# Altium PCB LORA_NODE_SENSOR.PcbDoc
Units mil, origin at the board's own origin, x right, y up, seen from the top; angles counter-clockwise.
Board outline 3149.61 x 3937.01 mil, 2 copper layers (Top Layer, Bottom Layer); 48 components, 35 nets, 212 pads, 16 vias.
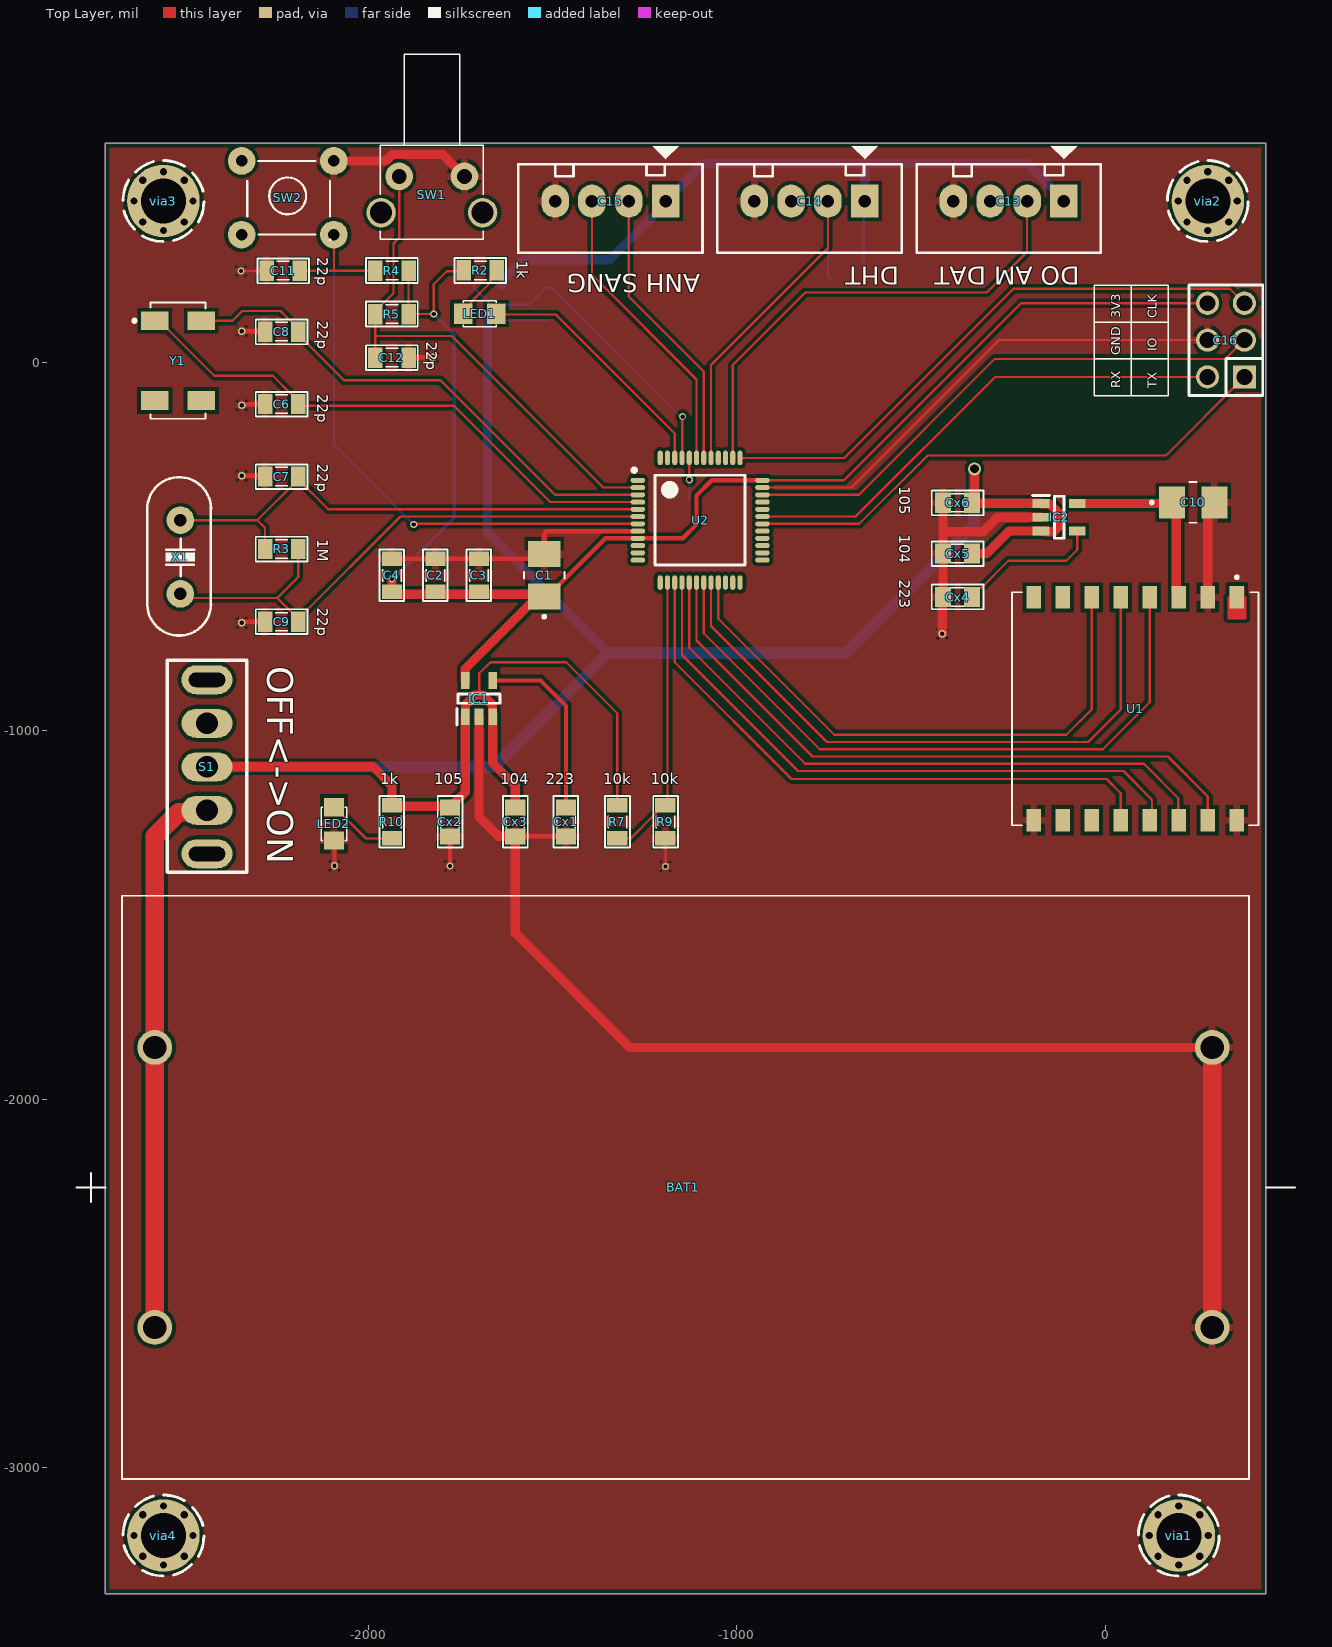
[diagram p0: Top Layer view]
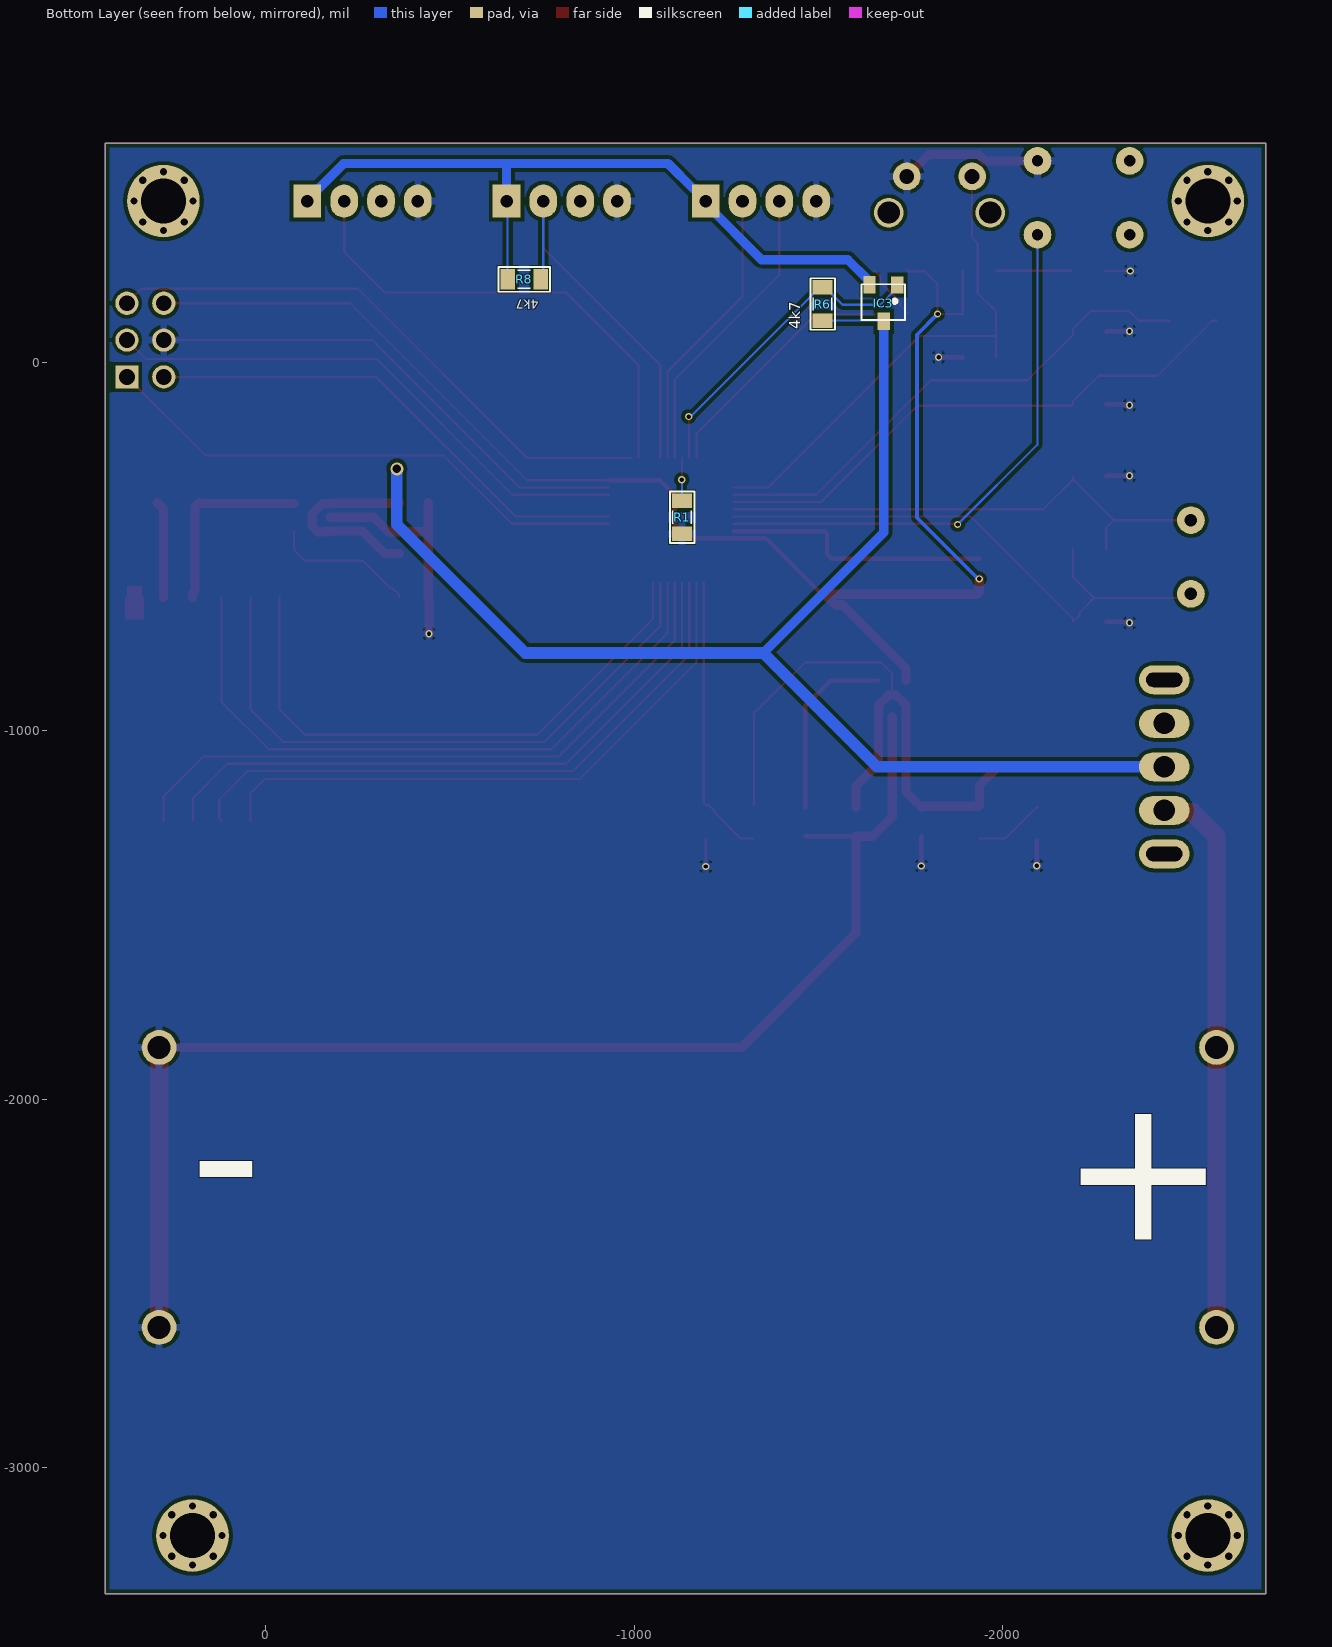
[diagram p1: Bottom Layer view, seen from below]
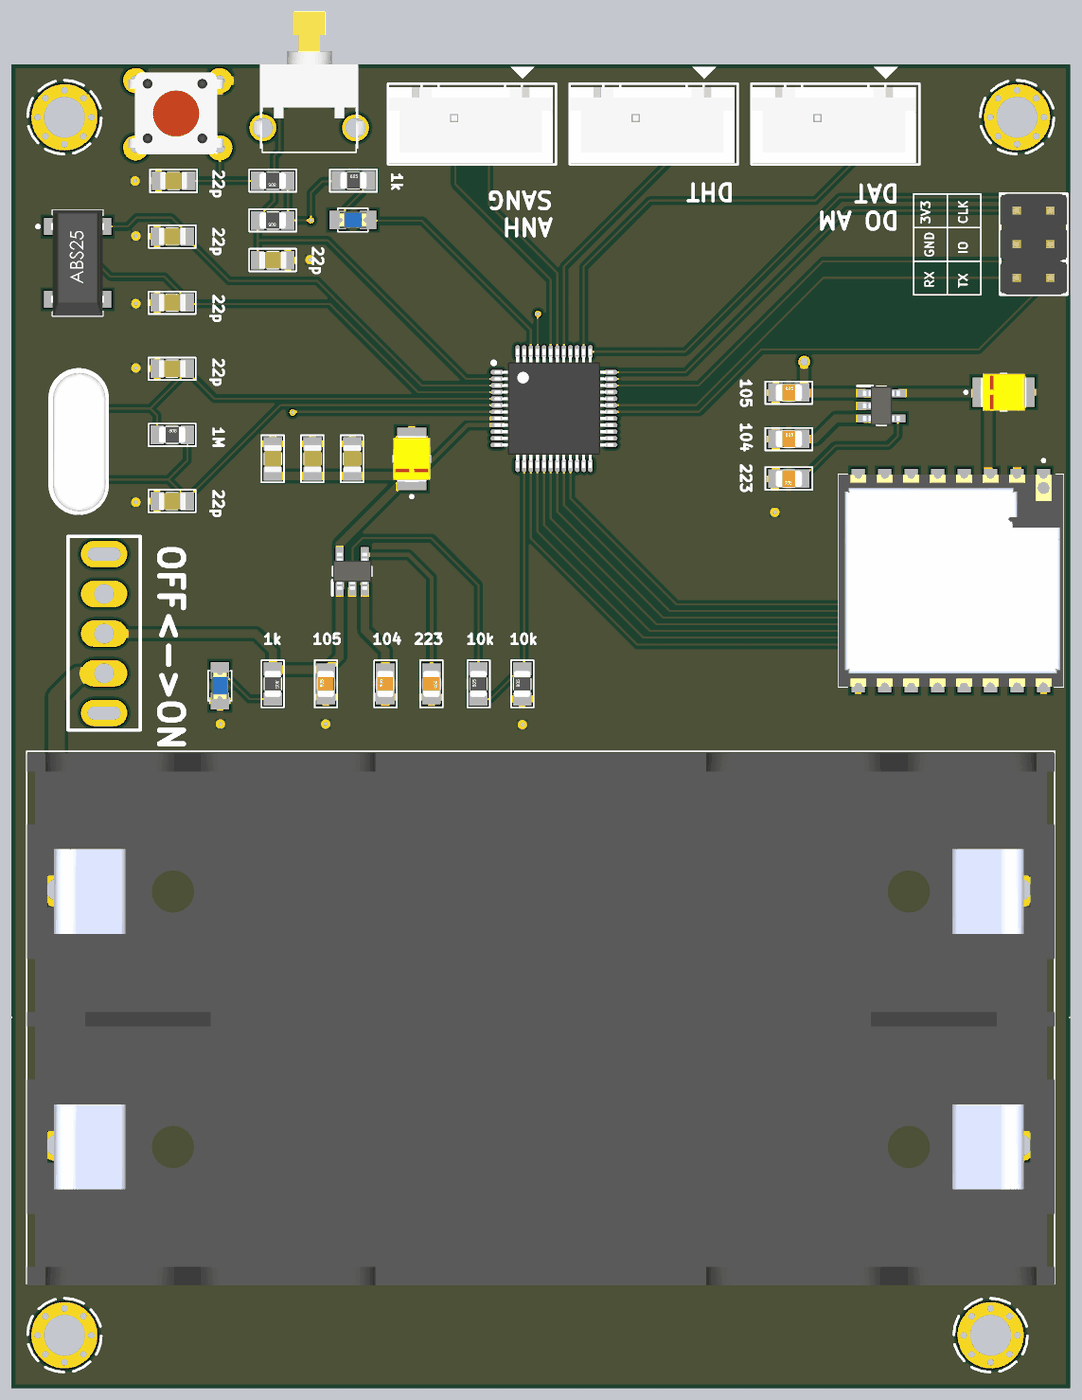
[diagram p2: 3D render of the assembled board from above, using the file's embedded part models]
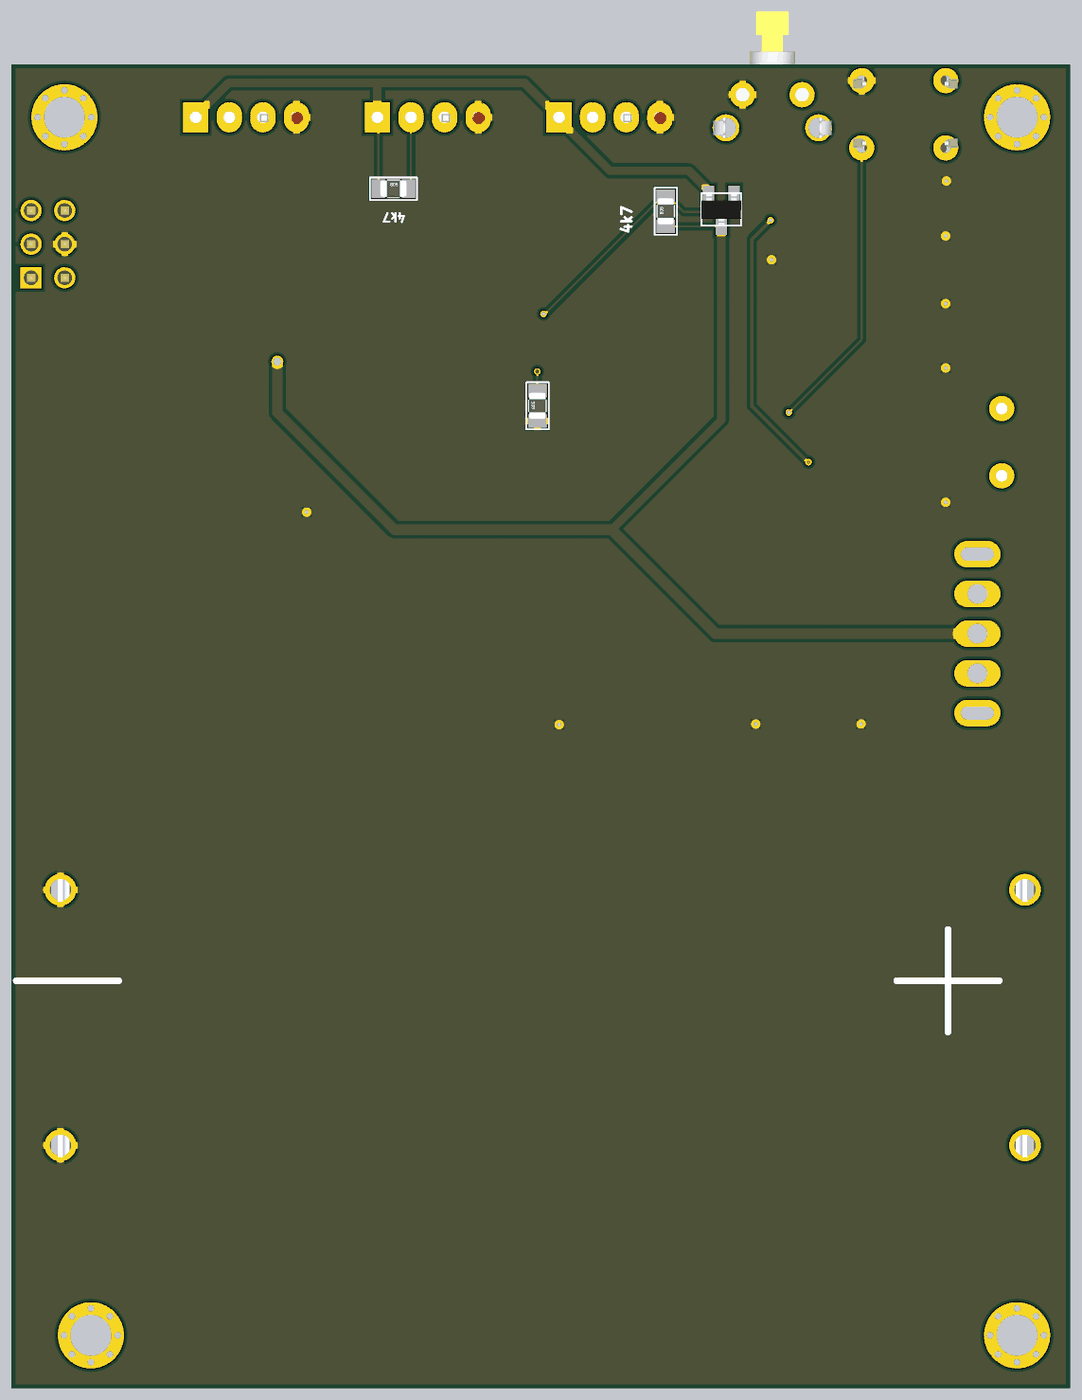
[diagram p3: 3D render of the assembled board from below, using the file's embedded part models]

## Layer stack, top to bottom
Top Solder: solder mask 0.4, Solder Resist, Dk 3.5
Top Layer: signal copper 1.4
Dielectric 1: dielectric 12.6, FR-4, Dk 4.8
Bottom Layer: signal copper 1.4
Bottom Solder: solder mask 0.4, Solder Resist, Dk 3.5

## Board outline
-2714.17,-3341.34 435.43,-3341.34 435.43,595.67 -2714.17,595.67

## Design rules (kind name [scope] priority, off if disabled: settings)
Clearance [All] p1: gap=10 ignorepadtopadclearanceinfootprint=FALSE except(5: Arc-Arc Arc-Track Arc-SMDPad Arc-THPad Arc-Via Arc-Text Arc-Hole Track-Track Track-SMDPad Track-THPad Track-Via Track-Text Track-Hole SMDPad-SMDPad SMDPad-THPad SMDPad-Via SMDPad-Text SMDPad-Hole THPad-THPad THPad-Via THPad-Text THPad-Hole Via-Via Via-Text Via-Hole Text-Text Text-Hole)
PolygonConnect [All] p1: connectstyle=Relief reliefconductorwidth=20 reliefentries=4 polygonreliefangle="90 Angle" airgapwidth=10
RoutingVias [All] p1: holewidth=118.11 width=19.68 viastyle="Through Hole" minholewidth=11.81 minwidth=19.68 maxholewidth=11.81 maxwidth=19.68
SolderMaskExpansion [All] p1: expansion=4 istentingtop=FALSE
Width [All] p1: maxlimit=50 minlimit=6 preferedwidth=25
30 further rules are at their usual default settings.

## Components (designator, comment, footprint, x,y, rotation, side; value= is the part's Value field where it differs from the comment)
BAT1 "18650 Cell" BAT_BK-18650-PC4 -1139.38,-2238.98 r0 top
C1 "Cap Tantalum" "TANTALUM 3528" -1523.24,-577.41 r90 top
C2 "104" CAP_0805 -1818.51,-577.41 r270 top value=33p
C3 "104" CAP_0805 -1700.4,-577.41 r270 top value=33p
C4 "104" CAP_0805 -1936.62,-577.41 r270 top value=33p
C6 "22p" CAP_0805 -2236.11,-112.75 r0 top value=33p
C7 "22p" CAP_0805 -2236.11,-309.35 r0 top value=33p
C8 "22p" CAP_0805 -2236.11,83.85 r0 top value=33p
C9 "22p" CAP_0805 -2236.11,-703.55 r180 top value=33p
C10 "Cap Tantalum" "TANTALUM 3528" 238.01,-379.71 r0 top
C11 "0.1uF" CAP_0805 -2231.9,249.36 r0 top value=33p
C12 "0.1uF" CAP_0805 -1936.62,13.14 r180 top value=33p
C13 "Header4" Header4 -112.61,438.18 r180 top
C14 "Header4" Header4 -653.16,438.18 r180 top
C15 "Header4" Header4 -1193.71,438.18 r180 top
C16 "JP3x2" JP3-D2T 327.16,60.94 r90 top locked
Cx1 "223,0805" CN-SMD-0805 -1464.18,-1246.7 r270 top value=33pF
Cx2 "105,0805" CN-SMD-0805 -1779.14,-1246.7 r90 top value=33pF
Cx3 "104,0805" CN-SMD-0805 -1601.98,-1246.7 r90 top value=33pF
Cx4 "223,0805" CN-SMD-0805 -401.18,-636.46 r180 top value=33pF
Cx5 "105,0805" CN-SMD-0805 -401.19,-518.35 r0 top value=33pF
Cx6 "104,0805" CN-SMD-0805 -401.19,-380.56 r0 top value=33pF
IC1 "SPX3819M5-3.3_TR" SOT95P280X145-5N -1700.4,-912.06 r90 top locked
IC2 "SPX3819M5-3.3_TR" SOT95P280X145-5N -125.6,-419.93 r0 top
IC3 "AO3400" SOT23A -1677.17,161.57 r0 bottom
LED1 "LED-Blue" LED-0805-Blue -1743.32,132.75 r0 top value=Blue
LED2 "LED-Blue" LED-0805-Blue -2094.1,-1207.33 r270 top value=Blue
R1 "10K" RES-SMD-0805 -1129.54,-419.93 r90 bottom
R2 "1K" RES-SMD-0805 -1696.82,250.36 r0 top
R3 "1M" RES-SMD-0805 -2236.11,-505.95 r0 top
R4 "10K" RES-SMD-0805 -1936.62,249.36 r180 top
R5 "10K" RES-SMD-0805 -1936.62,131.25 r180 top
R6 "4.7k" RES-SMD-0805 -1511.03,158.81 r90 bottom
R7 "100k" RES-SMD-0805 -1324.81,-1246.7 r90 top
R8 "4k7" RES-SMD-0805 -701.19,226.13 r180 bottom
R9 "100k" RES-SMD-0805 -1194.5,-1246.7 r90 top
R10 "1K" RES-SMD-0805 -1936.62,-1246.7 r270 top
S1 "Switch" Switch -2438.59,-1333.47 r90 top
SW1 "SW" SW1-DIP -1739.77,505.27 r180 top value="SW chip 2 pin"
SW2 "SW" SW2-DIP -2344.49,547.24 r0 top value="Button chip 4 pin"
U1 "RA-02H" LoRa-02 81.09,-939.77 r270 top locked
U2 "STM32" "LQFP 48" -1100.01,-427.96 r0 top
via1 "via" via 199.2,-3183.87 r0 top
via2 "via" via 277.94,438.18 r0 top
via3 "via" via -2556.7,438.18 r0 top
via4 "via" via -2556.7,-3183.87 r0 top
X1 "12Mhz" XT2 -2510.91,-527.96 r90 top value=4Mhz
Y1 "Crystal" "Crystal 32.768" -2517.33,5.11 r0 top

## Footprints (in the part's own frame and the unit in brackets; to place one, negate y for a bottom-side part, rotate by r counter-clockwise, add the part's x,y. Pads: shape width x height; smd on the part's side, far side on the other; paste and mask are expansions set on the pad)
BAT_BK-18650-PC4 [mm]
  round 2.4 hole 1.6: 1+(-36.6,9.65) 1-(36.3,9.65) 2+(-36.6,-9.65) 2-(36.3,-9.65)
  silkscreen extent -42,-20.1 42,20.1, body extent -38.84,-20.23 38.86,19.98, height 21.74
CAP_0805 [mil]
  rect 39.37x55 smd: 1(-45,0) 2(45,0)
  silkscreen extent -70,-34 70,33, body extent -40,-25 40,25, height 24
CN-SMD-0805 [mil]
  rect 43.31x55 smd: 1(-39.36,0.01) 2(39.37,0.01)
  silkscreen extent -70,-34 70,33, body extent -39,-25 39,25, height 31
"Crystal 32.768" [mm]
  rect 1.9x1.3 smd: 1(-1.6,2.75) 2(-1.6,-2.75) 3(1.6,-2.75) 4(1.6,2.75)
  silkscreen extent -3.11,-4 1.9,4, body extent -2,-4 2,4, height 2.65
Header4 [mil] "CON4"
  rect 75x90 hole 34: 1(0,0)
  oval 75x90 hole 34: 2(100,0) 3(200,0) 4(300,0)
  silkscreen extent -100,-150 400,140, body extent -90,-90 398,136, height 276
JP3-D2T [mm] "6 pins, dual pin, straight, gold plating"
  rect 1.6x1.6 hole 1.1: 1(-2.54,-1.27)
  round 1.6 hole 1.1: 2(0,-1.27) 3(2.54,-1.27) 4(2.54,1.27) 5(0,1.27) 6(-2.54,1.27)
  silkscreen extent -3.81,-2.54 3.81,2.54, body extent -3.81,-2.54 3.81,2.54, height 8.55
LED-0805-Blue [mil]
  rect 50x55 smd: 1(0,0) 2(90,0)
  silkscreen extent 0,-35 90,35, body extent 5,-25 85,25, height 43
LoRa-02 [mm]
  rect 1.536x1 smd paste-2 mask+0: 1(-7.682,7)
  rect 1.536x1 smd: 2(-7.682,5) 3(-7.682,3) 4(-7.682,1) 5(-7.682,-1) 6(-7.682,-3) 7(-7.682,-5) 8(-7.682,-7) 9(7.682,-7) 10(7.682,-5) 11(7.682,-3) 12(7.682,-1) 13(7.682,1) 14(7.682,3) 15(7.682,5) 16(7.682,7)
  Top Layer region: -6.188,6.365 -7.724,6.365 -7.724,6.5 -8.45,6.5 -8.45,7.5 -7.724,7.5 -7.724,7.635 -6.188,7.635
  silkscreen extent -9.17,-8.5 8.03,8.5, body extent -8,-8.5 8,8.5, height 3.4
"LQFP 48" [mm] "LQFP, 48-Leads, Body 7,00x7,00mm, Pitch 0,50mm, IPC Medium Density"
  oval 1x0.35 smd: 1(-4.296,2.75) 2(-4.296,2.25) 3(-4.296,1.75) 4(-4.296,1.25) 5(-4.296,0.75) 6(-4.296,0.25) 7(-4.296,-0.25) 8(-4.296,-0.75) 9(-4.296,-1.25) 10(-4.296,-1.75) 11(-4.296,-2.25) 12(-4.296,-2.75) 25(4.296,-2.75) 26(4.296,-2.25) 27(4.296,-1.75) 28(4.296,-1.25) 29(4.296,-0.75) 30(4.296,-0.25) 31(4.296,0.25) 32(4.296,0.75) 33(4.296,1.25) 34(4.296,1.75) 35(4.296,2.25) 36(4.296,2.75)
  oval 0.35x1 smd: 13(-2.75,-4.296) 14(-2.25,-4.296) 15(-1.75,-4.296) 16(-1.25,-4.296) 17(-0.75,-4.296) 18(-0.25,-4.296) 19(0.25,-4.296) 20(0.75,-4.296) 21(1.25,-4.296) 22(1.75,-4.296) 23(2.25,-4.296) 24(2.75,-4.296) 37(2.75,4.296) 38(2.25,4.296) 39(1.75,4.296) 40(1.25,4.296) 41(0.75,4.296) 42(0.25,4.296) 43(-0.25,4.296) 44(-0.75,4.296) 45(-1.25,4.296) 46(-1.75,4.296) 47(-2.25,4.296) 48(-2.75,4.296)
  silkscreen extent -4.67,-3.1 3.1,3.57, body extent -4.5,-4.5 4.5,4.5, height 1.6
RES-SMD-0805 [mil]
  rect 39.37x55 smd: 1(-45,0) 2(45,0)
  silkscreen extent -70,-34 70,33, body extent -39,-25 39,25, height 31
SOT23A [mm] "SOT 23A"
  rect 0.85x1.2 smd: 1(-0.94,-1.245) 2(0.005,1.25) 3(0.985,-1.25)
  silkscreen extent -1.47,-1.3 1.52,1.17, body extent -1.5,-1.3 1.5,1.2, height 1.06
SOT95P280X145-5N [mm]
  rect 1.15x0.6 smd: 1(-1.25,0.95) 2(-1.25,0) 3(-1.25,-0.95) 4(1.25,-0.95) 5(1.25,0.95)
  silkscreen extent -1.83,-1.45 0.33,1.5, body extent -1.4,-1.45 1.4,1.45, height 1.45
SW1-DIP [mil]
  round 75 hole 40: 1(0,0) 2(177.16,0)
  round 80 hole 60: ""(-49.21,98.43) ""(226.38,98.43)
  silkscreen extent -51,-331 228,171, body extent -87,-398 265,160, height 283
SW2-DIP [mil] "SW button 4pin, 250 x250 mil"
  round 75 hole 31: 1(0,0) 2(0,-200) 3(250,-200) 4(250,0)
  silkscreen extent 15,-215 240,0, body extent -36,-220 276,24, height 276
Switch [mm]
  oval 2x3.5 hole 1.5: 1(3,0) 2(6,0) 3(9,0)
  oval 2x3.5 hole 1 slot 2.5 at 90 deg: ""(0,0) ""(12,0)
  silkscreen extent -1.27,-2.73 13.33,2.73
"TANTALUM 3528" [mm] "3528"
  rect 1.79x2.21 smd: 1(-1.46,0) 2(1.46,0)
  silkscreen extent -2.95,-1.4 0.25,1.4, body extent -1.75,-1.4 1.75,1.4, height 2.1
via [mm] "via?"
  round 0.5 hole 0.5: 1(-2.032,0) 1(-1.437,-1.437) 1(-1.437,1.437) 1(0,-2.032) 1(0,2.032) 1(1.437,-1.437) 1(1.437,1.437) 1(2.032,0)
  round 5 hole 3.1: 1(0,0)
  silkscreen extent -2.78,-2.78 2.78,2.8
XT2 [mil] "Footpin for Crystal 2 pin"
  round 75 hole 34: 1(-100,0) 2(100,0)
  silkscreen extent -213,-83 217,90, body extent -216,-87 216,90, height 144

## Part data
BAT1: "Battery Holder (Open) 18650 2 Cell PC Pin", Package=None, Availability=Unavailable, MP=BK-18650-PC4, Price=None
C1 C10: "Capacitor, Tantalum", Package="SMD-2 Kemet", Availability="In Stock", Check_prices=https://www.snapeda.com/parts/T493C106K020BH6310/Kemet/view-part/?ref=eda, MF=Kemet, MP=T493C106K020BH6310, Price=None, SnapEDA_Link=https://www.snapeda.com/parts/T493C106K020BH6310/Kemet/view-part/?ref=snap
C2 C3 C4 C6 C7 C8 C9 C11 C12: library part CapSMD, "Capacitor", LatestRevisionDate=17-Jul-2002, LatestRevisionNote="Re-released for DXP Platform.", PackageReference=RAD-0.3, Published=8-Jun-2000, Publisher="Altium Limited"
C13 C14 C15: "Header IDC, 4 x 1 Pin Vertical 2.54mm Pitch (Non-Boxed, Male)", Manufacturer="W¨¹rth Elektronik eiSos GmbH", partNo=613002143121, ComponentLink1 Description=Manufacturer, ComponentLink1URL=http://www.we-online.com, ComponentLink2 Description=Datasheet, ComponentLink2URL=http://katalog.we-online.de/em/datasheet/6130xx143121.pdf, Created by="Karrer Zheng", Created Date="29 March 2013", NoPins=02
C16: "WR-PHD 2.54 mm Dual Socket Header", Manufacturer="W¨¹rth Elektronik eiSos GmbH", partNo=61300621821, ComponentLink1 Description=Manufacturer, ComponentLink1URL=http://www.we-online.com, ComponentLink2 Description=Datasheet, ComponentLink2URL=http://katalog.we-online.de/em/datasheet/6130xx21821.pdf, Created by="Karrer Zheng", Created Date="29 March 2013", NoPins=06
Cx1 Cx2 Cx3 Cx4 Cx5 Cx6: library part CN
IC1 IC2: "Integrated Circuit", Manufacturer_Name=MaxLinear, Manufacturer_Part_Number=SPX3819M5-3.3/TR, Datasheet Link=https://assets.maxlinear.com/web/documents/spx3819.pdf, Height=1.45mm
IC3: library part MOSFET_N, "Generic N Channel MOSFET"
LED1 LED2: "LED Blue 10mA 2.2v", ComponentLink1Description=Datasheet, ComponentLink1URL="D:\Dropbox\Datasheets\Opto and Illumination\LEDs\SMD LED.pdf", Unit Price=0.0476
R1 R3 R4 R5 R6 R8: library part Res-SMD, "Resistor", Manufacturer="Generic Components", Class=Passive, Published=08/06/2000, Publisher="Altium Hobart Technology Centre"
R2 R7 R9 R10: library part "Resistor - SMD", "Resistor SMD", Manufacturer="Generic Components", Class=Passive, Published=08/06/2000, Publisher="Altium Hobart Technology Centre"
SW1: library part SW2, "Switch button 2 pin"
SW2: library part SW4, "Switch button 4 pin"
U1: "Ai-Thinker Lora Series Module", Package=Package, Availability="Not in stock", Check_prices=https://www.snapeda.com/parts/RA-01H/AI-Thinker/view-part/?ref=eda, MF=AI-Thinker, MP=RA-01H, Price=None, SnapEDA_Link=https://www.snapeda.com/parts/RA-01H/AI-Thinker/view-part/?ref=snap
U2: library part STM32F103C8T6, "STM32 ARM-based 32-bit MCU with 64 Kbytes Flash, 64-pin LQFP, Industrial Temperature"
via1 via2 via3 via4: library part "Vit oc"
X1: library part XT2, "Crystal, 32.768 KHz, -40 to 85 degC, 3.2 x 1.5 x 0.9 mm SMD"
Y1: "32.768 kHz", Package="4-4 Abracon", Availability="In Stock", Check_prices=https://www.snapeda.com/parts/ABS25-32.768KHZ-6-1-T/Abracon+LLC/view-part/?ref=eda, MF=Abracon, MP=ABS25-32.768KHZ-6-1-T, Price=None, Purchase-URL=https://pricing.snapeda.com/search/part/ABS25-32.768KHZ-6-1-T/?ref=eda, SnapEDA_Link=https://www.snapeda.com/parts/ABS25-32.768KHZ-6-1-T/Abracon+LLC/view-part/?ref=snap

## Via types
v1: diameter 19.68, hole 11.81, Top Layer to Bottom Layer, 15 vias
v2: diameter 35.43, hole 23.62, Top Layer to Bottom Layer, 1 vias

## Nets (pads, with @x,y where several pads share a name; then routed paths per layer and width w, separated by ;. In a path a pad name is that pad's centre, name@x,y a point inside that pad or via, vN(x,y) a via of type N, cw(c..) or ccw(c..) an arc to the next point about the centre after c; other vN are vias at no path point)
+3.3LORA: C10.1 IC2.5 U1.3 | length 523.4
  Top Layer w25: IC2.5 177.71,-382.53 C10.1 192.02,-391.2 192.02,-619.59 199.2,-626.78 U1.3
+3.3MCU: C1.1 C2.2 C3.2 C4.2 C16.4 IC1.5 R2.1 R4.1 R5.1 U2.9 U2.36 | length 4135.6
  Top Layer w6: R4.1 R5.1 -1891.23,131.65 v1(-1823.24,131.65) -1823.24,212.35 -1787.8,247.79 -1744.39,247.79 R2.1 ; U2.36 -709.69,-319.69 -229.06,160.94 C16.4
  Top Layer w11.81: C1.1 -1514.97,-634.89 -1357.25,-477.17 U2.9 -1147.41,-477.17 -1109.85,-439.61 -1109.85,-360.87 -1068.67,-319.69 U2.36
  Top Layer w25: v1(-1936.23,-587.25) -1936.23,-622.01 C4.2 -1930.38,-628.65 -1818.51,-628.65 -1700.4,-628.65 -1529.48,-628.65 C1.1 -1545.97,-657.63 -1564.08,-657.63 -1737.8,-831.35 IC1.5
  Bottom Layer w10: v1(-1936.23,-587.25) -1933.47,-587.25 -1767.33,-421.11 -1767.33,75.74 v1(-1823.24,131.65)
ADC: C13.2 U2.38 | length 1316.2
  Top Layer w6: U2.38 -1011.43,-6.54 -814.57,190.31 -322.45,190.31 -212.61,300.15 C13.2
ADC_Battery: R7.1 R9.2 U2.14 | length 777
  Top Layer w6: R7.1 -1288.31,-1291.7 -1219,-1222.39 -1219,-1218.39 -1202.31,-1201.7 R9.2 -1188.59,-1195.8 U2.14
BOOT_0: R1.2 U2.44 | length 116.4
  Top Layer w6: U2.44 -1129.34,-259.02 -1129.34,-317.76 v1(-1129.14,-317.96)
  Bottom Layer w6: R1.2 -1129.14,-374.54 v1(-1129.14,-317.96)
BT1: C12.2 R5.2 SW1.2 U2.2 | length 1401.9
  Top Layer w6: C12.2 -1981.62,72.2 ; SW1.2 -1916.94,338.57 -1932.29,323.22 -1932.29,188.4 -1981.62,139.07 R5.2 -1981.62,72.2 ; U2.2 -1362.84,-339.38 -1774.42,72.2 -1981.62,72.2
DHT: C14.2 R8.2 U2.41 | length 1043.4
  Top Layer w6: U2.41 -1070.48,-6.54 -753.16,310.78 C14.2
  Bottom Layer w6: C14.2 -753.16,233.1 R8.2
enSensor: IC3.1 R6.2 U2.45 | length 870.7
  Top Layer w6: U2.45 -1148.43,-258.04 -1148.43,-147.49 v1(-1147.65,-146.7)
  Bottom Layer w6: IC3.1 -1714.17,203.68 -1667.34,156.84 -1564.97,156.84 -1535.53,186.28 -1535.53,187.12 -1518.85,203.81 -1503.22,203.81 -1155.32,-144.08 -1150.26,-144.08 v1(-1147.65,-146.7)
GND: BAT1.1- BAT1.2- C1.2 C2.1 C3.1 C4.1 C6.1 C7.1 C8.1 C9.2 C10.2 C11.1 C12.1 C13.4 C14.4 C15.4 C16.5 Cx1.2 Cx2.1 Cx3.1 Cx4.2 Cx5.1 Cx6.1 IC1.2 IC2.2 LED2.2 R1.1 R9.1 SW1.1 SW2.4 U1.2 U1.9 U1.16 U2.8 U2.35 | length 7558.4
  Top Layer w6: v1(-2346.46,248.57) -2277.69,248.57 C11.1 ; R9.1 -1194.1,-1292.1 v1(-1194.1,-1367.96) ; U2.35 -689.38,-339.38 -289.06,60.94 C16.5
  Top Layer w11.81: v1(-2344.1,-706.54) -2341.97,-706.54 -2338.98,-703.55 C9.2 ; v1(-2344.1,-307.33) -2283.13,-307.33 C7.1 ; v1@-2337.41,85.19 -2282.45,85.19 C8.1 ; v1@-2336.23,-115.99 -2334.1,-115.99 -2330.86,-112.75 C6.1 ; LED2.2 -2092.53,-1298.91 v1(-2092.53,-1365.99) ; C4.1 C2.1 C3.1 -1535.72,-532.41 C1.2 -1523.24,-464.41 -1516.32,-457.49 U2.8 ; C12.1 -1890.44,14.32 v1(-1825.99,14.32) ; v1@-1781.11,-1368.35 v1(-1779.15,-1366.39) Cx2.1 ; Cx3.1 -1596.14,-1286.07 Cx1.2
  Top Layer w25: SW2.4 -1952.74,547.24 -1935.66,564.32 -1798.83,564.32 SW1.1 ; IC1.2 -1700.4,-1232.96 -1647.3,-1286.07 Cx3.1 -1601.98,-1548.02 -1290.94,-1859.06 BAT1.1- ; v1(-442.92,-736.07) -442.92,-638.83 Cx4.2 ; Cx4.2 -440.56,-444.66 Cx6.1 ; -425.91,-459.3 -332.44,-459.3 -293.07,-419.93 IC2.2 ; U1.2 277.94,-397.25 C10.2
  Top Layer w50: BAT1.2- BAT1.1-
  other v1: -2344.1,-115.99 -2344.1,85.19
LED: LED1.2 U2.46 | length 685.3
  Top Layer w6: LED1.2 -1650.82,130.25 -1491.92,130.25 -1168.91,-192.76 U2.46
LoRa_DIO0: U1.5 U2.20 | length 1701.7
  Top Layer w6: U2.20 -1070.48,-715.2 -755.52,-1030.17 -46.86,-1030.17 41.72,-941.58 U1.5
LoRa_DiO1: U1.6 U2.21 | length 1575.5
  Top Layer w6: U2.21 -1050.8,-695.52 -735.83,-1010.48 -105.91,-1010.48 -37.02,-941.58 U1.6
LoRa_MISO: U1.13 U2.16 | length 1693.3
  Top Layer w6: U2.16 -1149.22,-793.94 -834.26,-1108.91 48.93,-1108.91 126.41,-1186.39 126.41,-1236.27 U1.13
LoRa_MOSI: U1.14 U2.17 | length 1733.9
  Top Layer w6: U2.17 -1129.54,-774.26 -814.57,-1089.22 104.53,-1089.22 198,-1182.69 198,-1241.01 U1.14
LoRa_NSS: U1.15 U2.18 | length 1785
  Top Layer w6: U2.18 -1109.85,-754.57 -794.89,-1069.54 169.68,-1069.54 277.94,-1177.8 U1.15
LoRa_RESET: U1.4 U2.19 | length 1816.5
  Top Layer w6: U2.19 -1090.17,-734.89 -775.2,-1049.85 -7.49,-1049.85 120.46,-921.9 U1.4
LoRa_SCK: U1.12 U2.15 | length 1647.6
  Top Layer w6: U2.15 -1168.91,-813.63 -852.25,-1130.28 3.1,-1130.28 41.72,-1168.91 U1.12
NetBAT1_1+: BAT1.1+ BAT1.2+ S1.1 | length 1504
  Top Layer w50: BAT1.2+ BAT1.1+ -2580.32,-1285.83 -2515.35,-1220.86 -2444.09,-1220.86 S1.1
NetC6_2: C6.2 U2.4 Y1.1 | length 1519.6
  Top Layer w6: Y1.1 -2568.51,113.38 -2419.26,-35.87 -2260.36,-35.87 -2207.99,-88.25 -2207.8,-88.25 -2191.11,-104.94 C6.2 -2186.85,-117.02 -1768.24,-117.02 -1506.5,-378.75 U2.4
NetC7_2: C7.2 R3.1 U2.5 X1.2 | length 1415.7
  Top Layer w6: X1.2 -2301.91,-427.96 ; R3.1 -2281.11,-448.76 -2301.91,-427.96 ; C7.2 C7.2@-2191.11,-317.17 ; U2.5 -2109.85,-398.43 C7.2@-2191.11,-317.17 ; -2301.91,-427.96 C7.2@-2191.11,-317.17
NetC8_2: C8.2 U2.3 Y1.4 | length 1412
  Top Layer w6: Y1.4 -2369.18,113.38 -2342.72,139.83 -2239.26,139.83 -2223.53,124.1 ; -2223.53,124.08 -2191.11,91.67 C8.2 -2191.11,76.04 -2066.8,-48.28 -1804.89,-48.28 -1494.1,-359.06 U2.3
NetC9_1: C9.1 R3.2 U2.6 X1.1 | length 1557
  Top Layer w6: X1.1 -2499.96,-638.91 -2247.76,-638.91 ; R3.2 -2191.11,-582.26 -2247.76,-638.91 ; U2.6 -1913.49,-418.12 -2191.11,-695.74 C9.1 -2207.8,-686.87 -2207.8,-678.87 -2247.76,-638.91
NetC13_1: C13.1 C14.1 C15.1 IC3.3 R8.1 | length 2039.6
  Bottom Layer w6: R8.1 -656.19,435.15 C14.1
  Bottom Layer w25: IC3.3 -1634.14,215.01 -1634.14,224.68 -1579.54,279.28 -1345.11,279.28 -1193.71,430.68 C15.1 -1193.71,445.68 -1168.71,470.68 -1161.21,470.68 -1091.58,540.31 -651.31,540.31 ; C14.1 -653.16,538.46 -651.31,540.31 ; C13.1 -112.61,445.68 -137.61,470.68 -141.41,470.68 -211.03,540.31 -651.31,540.31
NetCx1_1: Cx1.1 IC1.4 | length 503
  Top Layer w11.81: IC1.4 -1533.08,-862.84 -1464.18,-931.74 Cx1.1
NetCx4_1: Cx4.1 IC2.4 | length 393
  Top Layer w6: Cx4.1 -361.82,-630.62 -343.17,-611.96 -337.32,-611.96 -263.39,-538.04 -105.91,-538.04 -76.39,-508.51 IC2.4
NetLED1_1: LED1.1 R2.2 | length 155.5
  Top Layer w6: LED1.1 -1721.86,154.21 -1721.86,164.52 -1668.5,217.88 -1668.5,233.68 R2.2
NetLED2_1: LED2.1 R10.2 | length 192.4
  Top Layer w6: LED2.1 -2091.6,-1207.33 -2007.23,-1291.7 R10.2
NRST: C11.2 R4.2 SW2.3 U2.7 | length 1789.9
  Top Layer w6: C11.2 -2092.53,249.36 ; SW2.3 -2094.1,346.86 -2094.1,250.94 -2092.53,249.36 ; R4.2 -2092.53,249.36 ; v1(-1877.57,-439.61) -1875.76,-437.8 U2.7
  Bottom Layer w6: SW2.3 -2094.1,346.86 -2094.1,-223.08 v1(-1877.57,-439.61)
SCL: C15.2 U2.42 | length 781.3
  Top Layer w6: C15.2 -1293.71,179.21 -1090.17,-24.33 U2.42
SDA: C15.3 U2.43 | length 814.6
  Top Layer w6: C15.3 -1393.71,237.94 -1109.85,-45.91 U2.43
SWCLK: C16.3 U2.37 | length 1575.5
  Top Layer w6: U2.37 -708.83,-258.83 -249.57,200.43 337.66,200.43 C16.3
SWIO: C16.2 U2.34 | length 1482
  Top Layer w6: U2.34 -669.06,-359.06 -300,10 326.22,10 C16.2
UART_RX: C16.6 U2.31 | length 1365
  Top Layer w6: U2.31 -678.12,-418.12 -299.06,-39.06 C16.6
UART_TX: C16.1 U2.30 | length 1473.2
  Top Layer w6: U2.30 -667.8,-437.8 -482.68,-252.68 163.54,-252.68 C16.1
VBAT: Cx2.2 Cx3.2 Cx5.2 Cx6.2 IC1.1 IC1.3 IC2.1 IC2.3 IC3.2 R6.1 R7.2 R10.1 S1.2 | length 6518.1
  Top Layer w6: -1699.61,-902.73 -1699.61,-843.55 -1669.3,-813.24 -1463.79,-813.24 -1324.81,-952.21 R7.2
  Top Layer w25: S1.2 -1987.65,-1097.25 -1936.62,-1148.28 R10.1 -1933.81,-1204.51 -1781.96,-1204.51 Cx2.2 ; Cx2.2@-1764.15,-1192.33 -1737.8,-1165.98 IC1.1 ; IC1.1@-1737.11,-960.58 -1737.11,-929.08 -1710.76,-902.73 -1699.61,-902.73 -1690.05,-902.73 -1663.69,-929.08 -1663.69,-951.13 -1663,-951.82 IC1.3 -1663,-1087.25 -1601.98,-1148.28 Cx3.2 ; Cx5.2 -322.45,-518.35 -261.43,-457.33 IC2.3 -174.12,-458.02 -162.23,-458.02 -160.95,-459.3 -140.24,-459.3 -125.6,-444.65 -125.6,-409.94 -152.33,-383.22 -174.12,-383.22 IC2.1 -175.5,-381.84 -360.53,-381.84 Cx6.2 -355.52,-374.26 v2(-355.52,-288.43)
  Bottom Layer w6: IC3.2 -1675.52,113.81 R6.1
  Bottom Layer w25: IC3.2 -1676.97,-461.46 -1350,-788.43
  Bottom Layer w31.5: S1.2 -1658.82,-1097.25 -1350,-788.43 -704.34,-788.43 -355.52,-439.61 v2(-355.52,-288.43)
pads on no net: C13.3 C14.3 S1. S1.3 SW1. SW2.1 SW2.2 U1.1 U1.7 U1.8 U1.10 U1.11 U2.1 U2.10 U2.11 U2.12 U2.13 U2.22 U2.23 U2.24 U2.25 U2.26 U2.27 U2.28 U2.29 U2.32 U2.33 U2.39 U2.40 U2.47 U2.48 via1.1 via2.1 via3.1 via4.1 Y1.2 Y1.3

## Polygon pours and split planes (outlines as drawn)
GND on Bottom Layer "GND_L02_P001" (solid, remove dead copper, pour order 1): -2714.17,-3341.34 435.43,-3341.34 435.43,595.67 -2714.17,595.67
GND on Top Layer "GND_L01_P000" (solid, remove dead copper, pour order 0): -2714.17,-3341.34 435.43,-3341.34 435.43,595.67 -2714.17,595.67

## Keep-outs
Keep-Out Layer:
  the board outline again, w4

## Silkscreen, mask and mechanical layers (free items; w line width, h text height)
Top Overlay:
  lines w4: 170,110 -30,110 -30,210 ; -30,210 170,210 170,-90 -30,-90 -30,210 ; -30,210 70,210 70,10 ; 70,10 170,10 70,10 ; 70,10 70,-90 70,10 ; 70,10 -30,10 70,10
  text "22p" at -2139.76,285.43 h30 r270
  text "1k" at -1598.43,276.38 h30 r270
  text "DHT" at -560,260 h50 r180
  text "DO AM DAT" at -70,260 h50 r180
  text "ANH SANG" at -1100,240 h50 r180
  text "3V3" at 40,120 h25 r90
  text "CLK" at 140,120 h25 r90
  text "22p" at -2139.76,113.78 h30 r270
  text "22p" at -1843.7,57.09 h30 r270
  text "IO" at 140,30 h25 r90
  text "GND" at 40,20 h25 r90
  text "RX" at 40,-70 h25 r90
  text "TX" at 140,-70 h25 r90
  text "22p" at -2139.76,-85.43 h30 r270
  text "22p" at -2139.76,-274.8 h30 r270
  text "105" at -559.84,-336.22 h30 r270
  text "104" at -559.84,-466.93 h30 r270
  text "1M" at -2139.76,-479.13 h30 r270
  text "223" at -559.84,-588.98 h30 r270
  text "22p" at -2139.76,-665.35 h30 r270
  text "1k" at -1967.72,-1144.49 h30
  text "105" at -1821.26,-1144.49 h30
  text "104" at -1642.91,-1144.49 h30
  text "223" at -1519.29,-1144.49 h30
  text "10k" at -1363.39,-1144.49 h30
  text "10k" at -1234.65,-1144.49 h30
Bottom Overlay:
  text "4k7" at -740,170 h25 r180
  text "4k7" at -1450,90 h30 r270
  text "+" at -2610,-2040 h400 r180
  text "-" at 10,-2040 h400 r180

## Text inside footprints (layer, text, board x,y; h text height)
S1: Top Overlay "OFF<->ON" at -2274.41,-824.02 h70.87 r270